# EAGLE board reva (EAGLE 9.6.2)
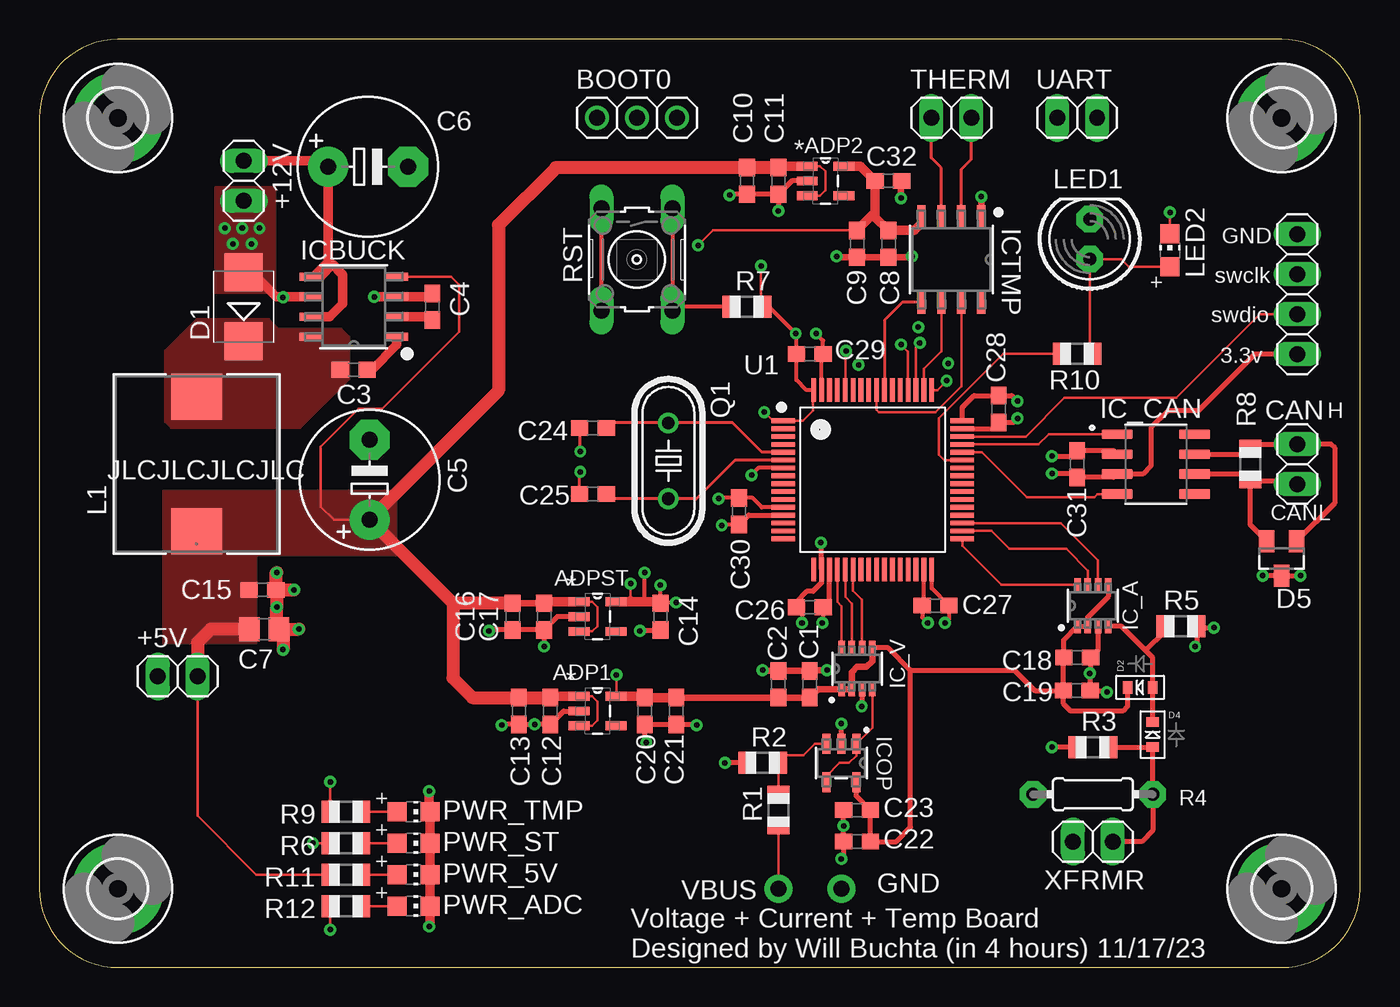
[diagram p0: board, top side]
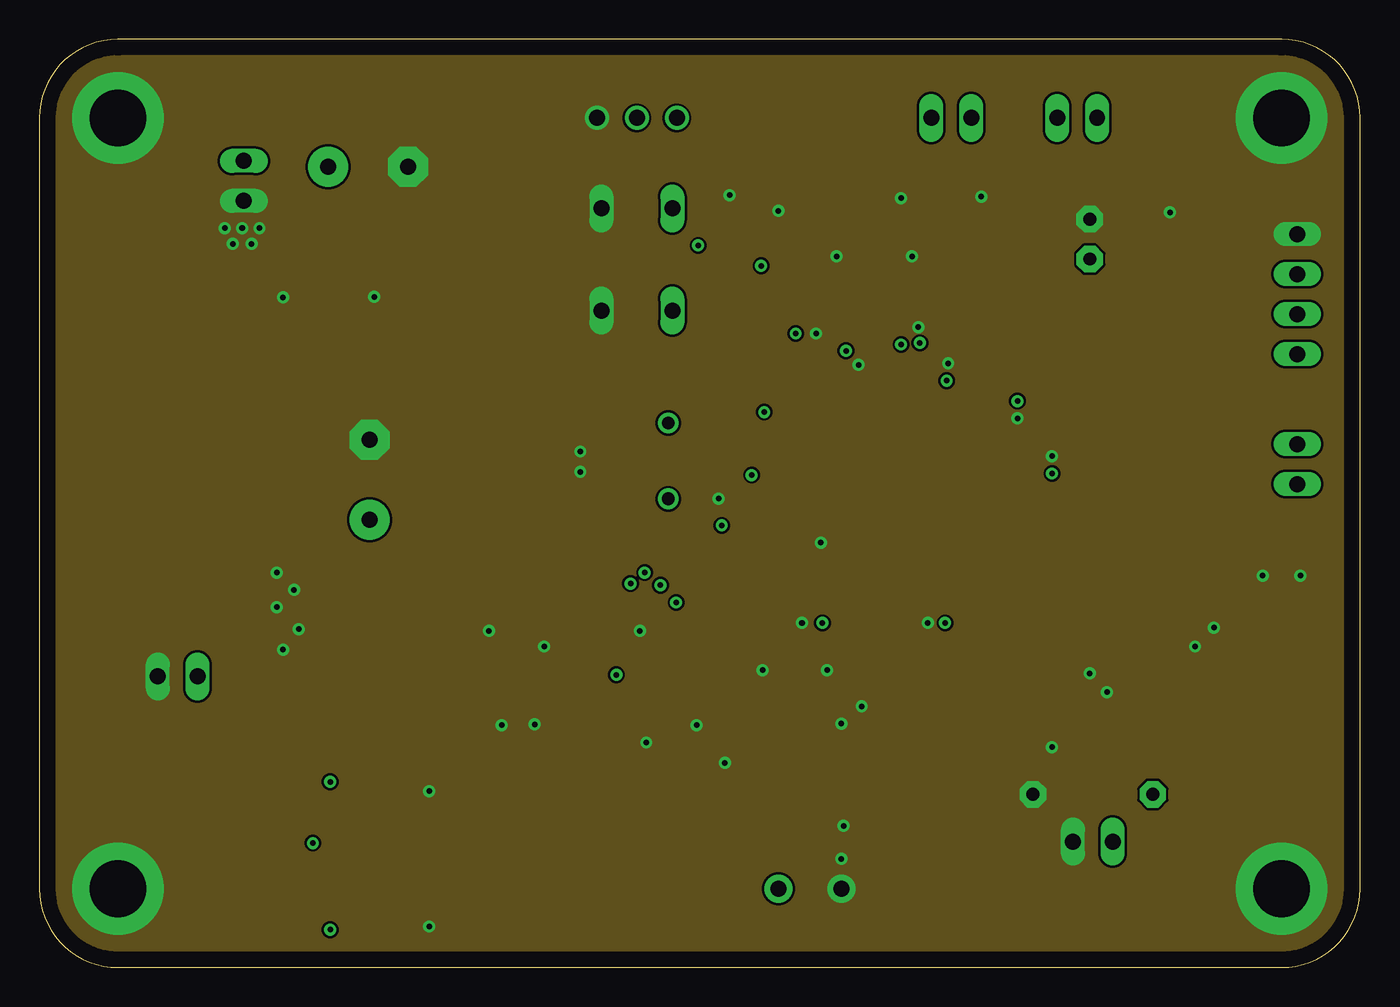
[diagram p1: board, inner layer Route2]
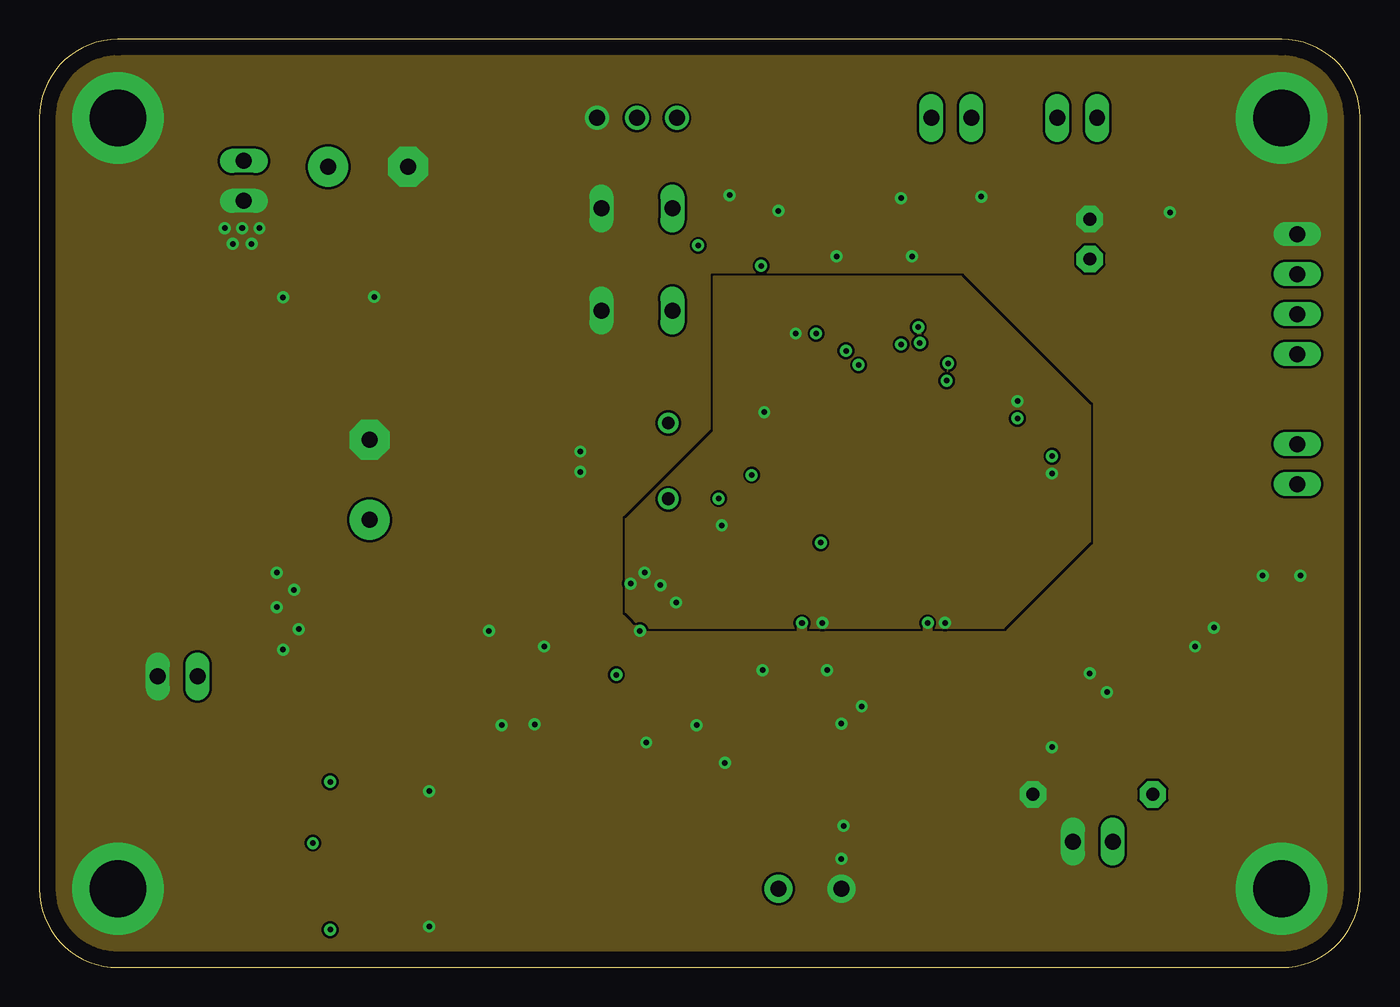
[diagram p2: board, inner layer Route15]
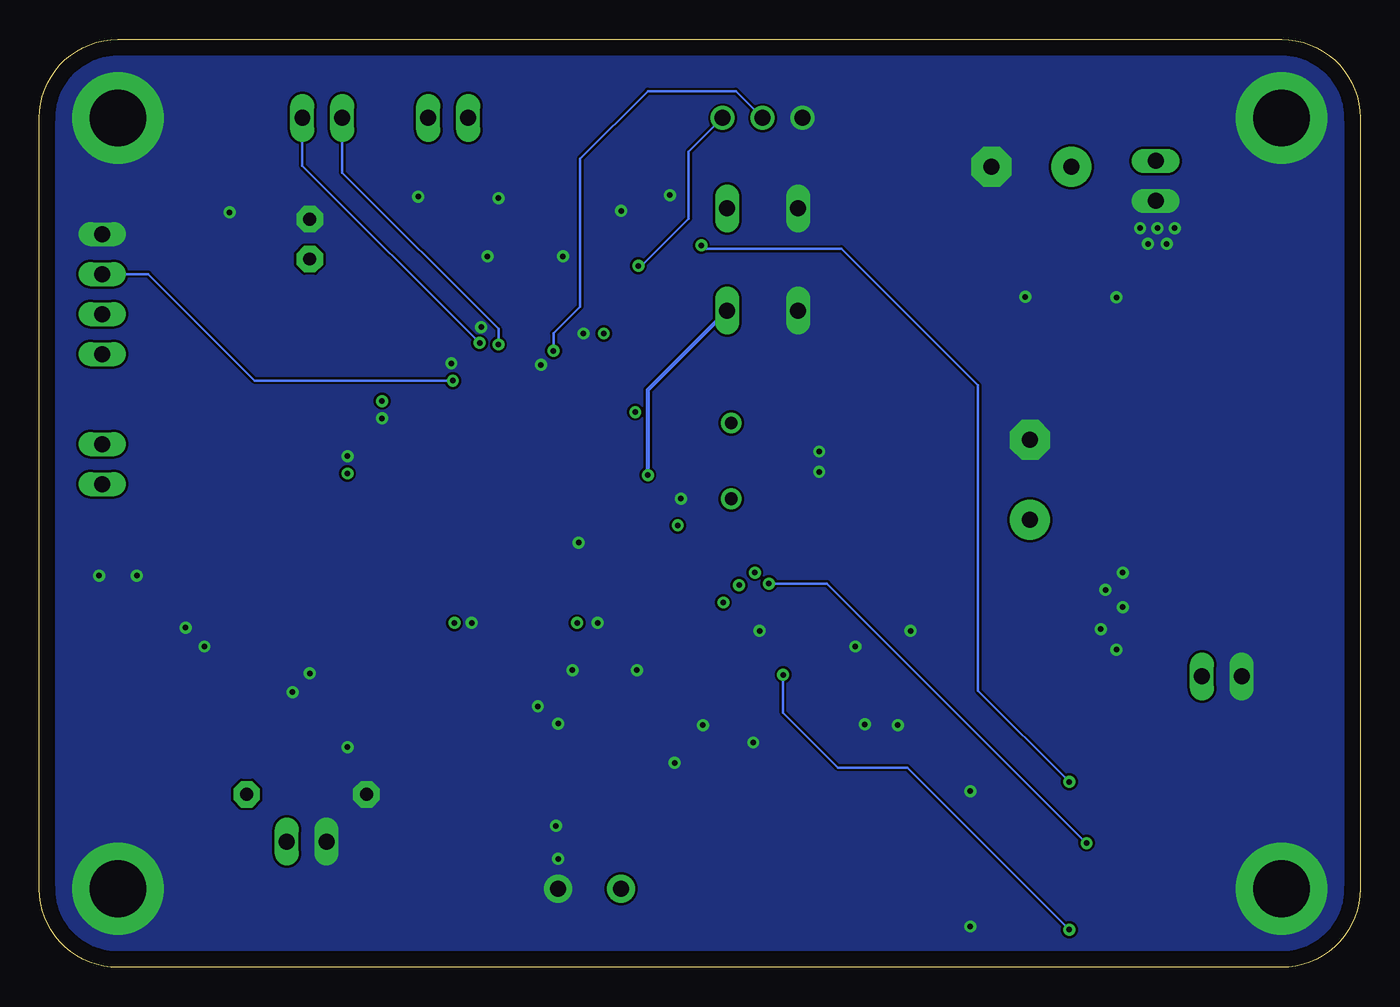
[diagram p3: board, bottom side, seen from below]

Size 84 x 59 mm. Coordinates in mm from the lower left corner, seen from the top.
Outline: 0,54 0,5 arc90 5,0 79,0 arc90 84,5 84,54 arc90 79,59 5,59 arc90 0,54
Copper layers (1+2*15+16): Top 0.035mm / dielectric 0.15mm / Route2 0.035mm / dielectric 0.15mm / Route15 0.035mm / dielectric 0.2mm / Bottom 0.035mm
Design rules "default *": minimum track width 6mil, minimum drill 0.3mm, track to track 6mil, track to pad 6mil, pad to pad 6mil, via to via 6mil, smd to smd 6mil, copper to edge 40mil, drill to drill 6mil, minimum pad ring 10mil, minimum via ring 8mil, stop-mask expansion 4mil, vias tented up to drill 0mil, thermal gap 10mil

## Footprints (pad centres in the part's own frame; a part is rotated, then mirrored left to right if it is on the bottom)
1X02 = drill 1.016 long: 1 -1.27,0; 2 1.27,0
SOT95P280X100-5N = smd 1.321 x 0.559: 1 -1.168,0.94; 2 -1.168,0; 3 -1.168,-0.94; 4 1.168,-0.94; 5 1.168,0.94
1X03 = drill 1.016: 1 -2.54,0; 2 0,0; 3 2.54,0
C0603 = smd 1.1 x 1: 1 -0.85,0; 2 0.85,0
E5-8,5 = drill 1.016 pad 2.54: + -2.54,0 | drill 1.016 pad 2.54 octagon: - 2.54,0
C0805 = smd 1.3 x 1.5: 1 -0.95,0; 2 0.95,0
SMB = smd 2.4 x 2.4: A 2.2,0; C -2.2,0
SOD-523 = smd 0.8 x 0.6: A 0,-0.8; K 0,0.8
SOT23 = smd 1 x 1.4: 1 -0.95,-1.1; 2 0.95,-1.1; 3 0,1.1
1X01-CLEANBIG = drill 1.016 pad 1.778: 1 0,0
3,6-PAD = drill 3.6 pad 5.842: B3,6 0,0
TSOT-23_TS8_LIT = smd 0.876 x 0.406: 1 -1.314,0.975; 2 -1.314,0.325; 3 -1.314,-0.325; 4 -1.314,-0.975; 5 1.314,-0.975; 6 1.314,-0.325; 7 1.314,0.325; 8 1.314,0.975
SOIC127P599X175-8N = smd 1.97 x 0.6: 1 -2.47,1.905; 2 -2.47,0.635; 3 -2.47,-0.635; 4 -2.47,-1.905; 5 2.47,-1.905; 6 2.47,-0.635; 7 2.47,0.635; 8 2.47,1.905
21-0041B_8_MXM = smd 1.46 x 0.533: 1 -2.724,1.905; 2 -2.724,0.635; 3 -2.724,-0.635; 4 -2.724,-1.905; 5 2.724,-1.905; 6 2.724,-0.635; 7 2.724,0.635; 8 2.724,1.905
RJ_5_ADI = smd 1.27 x 0.508: 1 -1.219,0.95; 2 -1.219,0; 3 -1.219,-0.95; 4 1.219,-0.95; 5 1.219,0.95
1X04 = drill 1.016 long: 1 -3.81,0; 2 -1.27,0; 3 1.27,0; 4 3.81,0
IND_IHLP-4040DZ_VIS = smd 2.921 x 3.251: 1 -4.28,0; 2 4.28,0
LED5MM = drill 0.813 pad 1.676 octagon: A -1.27,0; K 1.27,0
CHIP-LED0805 = smd 1.2 x 1.2: A 0,-1.05; C 0,1.05
HC49/S = drill 0.813: 1 -2.413,0; 2 2.413,0
R0805 = smd 1.1 x 1.4: 1 -1,0; 2 1,0
0204/7 = drill 0.813 pad 1.676 octagon: 1 -3.81,0; 2 3.81,0
B3F-10XX = drill 1.016 long: 1 -3.251,2.261; 2 3.251,2.261; 3 -3.251,-2.261; 4 3.251,-2.261
QFP50P1200X1200X160-64N = smd 1.5 x 0.3: 1 -5.7,3.75; 2 -5.7,3.25; 3 -5.7,2.75; 4 -5.7,2.25; 5 -5.7,1.75; 6 -5.7,1.25; 7 -5.7,0.75; 8 -5.7,0.25; 9 -5.7,-0.25; 10 -5.7,-0.75; 11 -5.7,-1.25; 12 -5.7,-1.75; 13 -5.7,-2.25; 14 -5.7,-2.75; 15 -5.7,-3.25; 16 -5.7,-3.75; 33 5.7,-3.75; 34 5.7,-3.25; 35 5.7,-2.75; 36 5.7,-2.25; 37 5.7,-1.75; 38 5.7,-1.25; 39 5.7,-0.75; 40 5.7,-0.25; 41 5.7,0.25; 42 5.7,0.75; 43 5.7,1.25; 44 5.7,1.75; 45 5.7,2.25; 46 5.7,2.75; 47 5.7,3.25; 48 5.7,3.75 | smd 0.3 x 1.5: 17 -3.75,-5.7; 18 -3.25,-5.7; 19 -2.75,-5.7; 20 -2.25,-5.7; 21 -1.75,-5.7; 22 -1.25,-5.7; 23 -0.75,-5.7; 24 -0.25,-5.7; 25 0.25,-5.7; 26 0.75,-5.7; 27 1.25,-5.7; 28 1.75,-5.7; 29 2.25,-5.7; 30 2.75,-5.7; 31 3.25,-5.7; 32 3.75,-5.7; 49 3.75,5.7; 50 3.25,5.7; 51 2.75,5.7; 52 2.25,5.7; 53 1.75,5.7; 54 1.25,5.7; 55 0.75,5.7; 56 0.25,5.7; 57 -0.25,5.7; 58 -0.75,5.7; 59 -1.25,5.7; 60 -1.75,5.7; 61 -2.25,5.7; 62 -2.75,5.7; 63 -3.25,5.7; 64 -3.75,5.7

## Placement (x,y rotation side)
+5V  [1X02]  8.8,18.5 0 top
+12V  [1X02]  13,50 90 top
ADP1  ADP122AUJZ-3.3-R7  [SOT95P280X100-5N]  35.5,16.3 0 top
ADP2  ADP122AUJZ-3.3-R7  [SOT95P280X100-5N]  50,50 0 top
ADPST  ADP122AUJZ-3.3-R7  [SOT95P280X100-5N]  35.5,22.3 0 top
BOOT0  [1X03]  38,54 0 top
C1  100n  [C0603]  49,18 90 top
C2  1u  [C0603]  47,18 90 top
C3  100n  [C0603]  20,38 180 top
C4  100n  [C0603]  25,42 90 top
C5  68u  [E5-8,5]  21,31 90 top
C6  68u  [E5-8,5]  20.9,50.9 0 top
C7  10u  [C0805]  14.3,21.5 0 top
C8  100n  [C0603]  54,46 270 top
C9  1u  [C0603]  52,46 270 top
C10  1u  [C0603]  45,50 270 top
C11  100n  [C0603]  47,50 270 top
C12  1u  [C0603]  32.5,16.3 270 top
C13  100n  [C0603]  30.5,16.3 270 top
C14  1u  [C0603]  39.5,22.3 270 top
C15  1u  [C0603]  14.2,24 0 top
C16  1u  [C0603]  30.1,22.3 270 top
C17  100n  [C0603]  32.1,22.3 270 top
C18  1u  [C0603]  66,19.7 0 top
C19  100n  [C0603]  65.98,17.6 0 top
C20  1u  [C0603]  38.5,16.3 270 top
C21  100n  [C0603]  40.5,16.3 270 top
C22  1u  [C0603]  52,8 180 top
C23  100n  [C0603]  52,10 180 top
C24  100n  [C0603]  35.2,34.3 180 top
C25  100n  [C0603]  35.2,30.1 180 top
C26  100n  [C0603]  49,22.9 180 top
C27  100n  [C0603]  57,23 180 top
C28  100n  [C0603]  61,35.5 270 top
C29  100n  [C0603]  49,39 0 top
C30  100n  [C0603]  44.5,29 90 top
C31  100n  [C0603]  66,32 90 top
C32  1u  [C0603]  54,50 0 top
CAN  [1X02]  80,32 90 top
D1  [SMB]  13,42 90 top
D2  [SOD-523]  70,17.8 90 top
D4  [SOD-523]  70.8,14.8 0 top
D5  PESD1CAN  [SOT23]  79,26 180 top
GND  [1X01-CLEANBIG]  51,5 0 top
H1  MOUNT-PAD-ROUND3.6  [3,6-PAD]  5,5 0 top
H2  MOUNT-PAD-ROUND3.6  [3,6-PAD]  79,54 0 top
H3  MOUNT-PAD-ROUND3.6  [3,6-PAD]  79,5 0 top
H4  MOUNT-PAD-ROUND3.6  [3,6-PAD]  5,54 0 top
IC_A  LTC2365  [TSOT-23_TS8_LIT]  67,23 90 top
IC_CAN  TCAN332DR  [SOIC127P599X175-8N]  71,32 0 top
IC_V  LTC2365  [TSOT-23_TS8_LIT]  52,19 90 top
ICBUCK  MAX5035BUSA+T  [21-0041B_8_MXM]  20,42 180 top
ICOP  AD8531  [RJ_5_ADI]  51,13 270 top
ICTMP  MAX31855KASA+T  [21-0041B_8_MXM]  58,45 270 top
JP1  [1X04]  80,42.8 90 top
L1  IHLP4040DZER101M11  [IND_IHLP-4040DZ_VIS]  10,32 90 top
LED1  [LED5MM]  66.8,46.3 90 top
LED2  [CHIP-LED0805]  71.9,45.6 0 top
PWR_5V  [CHIP-LED0805]  23.8,5.9 270 top
PWR_ADC  [CHIP-LED0805]  23.8,3.9 270 top
PWR_ST  [CHIP-LED0805]  23.8,7.9 270 top
PWR_TMP  [CHIP-LED0805]  23.8,9.9 270 top
Q1  [HC49/S]  40,32.2 270 top
R1  900k  [R0805]  47,10 90 top
R2  100k  [R0805]  46,13 0 top
R3  [R0805]  67,14 0 top
R4  [0204/7]  67,11 0 top
R5  10k  [R0805]  72.6,21.7 180 top
R6  1k  [R0805]  19.5,7.9 180 top
R7  10k  [R0805]  45,42 0 top
R8  120  [R0805]  77,32 90 top
R9  1k  [R0805]  19.5,9.9 180 top
R10  1k  [R0805]  66,39 180 top
R11  1k  [R0805]  19.5,5.9 180 top
R12  1k  [R0805]  19.5,3.9 180 top
RST  [B3F-10XX]  38,45 270 top
THERM  [1X02]  58,54 0 top
U1  STM32F105R8T6  [QFP50P1200X1200X160-64N]  53,31 0 top
UART  [1X02]  66,54 0 top
VBUS  [1X01-CLEANBIG]  47,5 0 top
XFRMR  [1X02]  67,8 0 top

## Library data of the parts
+5V +12V CAN JP1 THERM UART XFRMR = pinhead
ADP1 ADP2 ADPST = Analog Devices_By_element14_Batch_1; MPN: ADP122AUJZ-3.3-R7; OC_FARNELL: 1858064; OC_NEWARK: 60R3274; PACKAGE: SOT-23-5; SUPPLIER: ANALOG DEVICES
BOOT0 C5 C6 D2 D4 GND LED1 LED2 PWR_5V PWR_ADC PWR_ST PWR_TMP R1-R12 VBUS = adafruit
C1-C4 C7-C32 = rcl; SPICEPREFIX: C
D1 D5 = diode
H1-H4 = holes
IC_A IC_V = temp_sens_proj; COPYRIGHT: Copyright (C) 2023 Ultra Librarian. All rights reserved.; MANUFACTURER_PART_NUMBER: LTC2365ITS8#TRMPBF; MFR_NAME: Analog Devices Inc
IC_CAN = TCAN332DR; AVAILABILITY: In Stock; CHECK_PRICES: https://www.snapeda.com/parts/TCAN332DR/Texas+Instruments/view-part/?ref=eda; DESCRIPTION: 3.3-V CAN Transceivers; MF: Texas Instruments; MP: TCAN332DR; PACKAGE: SOIC-8 Texas Instruments; PRICE: None; PURCHASE-URL: https://www.snapeda.com/api/url_track_click_mouser/?unipart_id=381755&manufacturer=Texas Instruments&part_name=TCAN332DR&search_term=can; SNAPEDA_LINK: https://www.snapeda.com/parts/TCAN332DR/Texas+Instruments/view-part/?ref=snap
ICBUCK = max5035; COPYRIGHT: Copyright (C) 2023 Ultra Librarian. All rights reserved.; DIGIKEY_PART_NUMBER_1: MAX5035BUSA+T-ND; DIGIKEY_PART_NUMBER_2: MAX5035BUSA+TCT-ND; DIGIKEY_PART_NUMBER_3: MAX5035BUSA+TDKR-ND; DIGIKEY_PART_NUMBER_4: MAX5035BUSA+TTR-ND; MANUFACTURER_PART_NUMBER: max5035busa+T; MFR_NAME: Analog Devices Inc
ICOP = temp_sens_proj; COPYRIGHT: Copyright (C) 2023 Ultra Librarian. All rights reserved.; DIGIKEY_PART_NUMBER_1: AD8531ARTZ-REEL7CT-ND; DIGIKEY_PART_NUMBER_2: AD8531ARTZ-REEL7DKR-ND; DIGIKEY_PART_NUMBER_3: AD8531ARTZ-REEL7TR-ND; DIGIKEY_PART_NUMBER_4: 2156-AD8531ARTZ-REEL7-ND; MANUFACTURER_PART_NUMBER: AD8531ARTZ-REEL7; MFR_NAME: Analog Devices Inc
ICTMP = temp_sens_proj; COPYRIGHT: Copyright (C) 2023 Ultra Librarian. All rights reserved.; MANUFACTURER_PART_NUMBER: MAX31855KASA+T; MFR_NAME: Analog Devices / Maxim Integrated
L1 = temp_sens_proj; COPYRIGHT: Copyright (C) 2023 Ultra Librarian. All rights reserved.; DIGIKEY_PART_NUMBER_1: 541-1310-1-ND; DIGIKEY_PART_NUMBER_2: 541-1310-2-ND; DIGIKEY_PART_NUMBER_3: 541-1310-2-NDL; DIGIKEY_PART_NUMBER_4: 541-1310-6-ND; MANUFACTURER_PART_NUMBER: IHLP4040DZER101M11; MFR_NAME: Vishay
Q1 = adafruit; OC_FARNELL: 1667008; OC_NEWARK: unknown
RST = switch-omron; MPN: B3F-1000; OC_FARNELL: 176432; OC_NEWARK: 36M3542
U1 = STM32F105R8T6; CHECK_PRICES: https://www.snapeda.com/parts/STM32F105R8T6/STMicroelectronics/view-part/?ref=eda; DESCRIPTION: ARM® Cortex®-M3 STM32F1 Microcontroller IC 32-Bit 72MHz 64KB (64K x 8) FLASH 64-LQFP (10x10); DIGIKEY_PART_NUMBER: 497-8922-ND; MF: STMicroelectronics; MP: STM32F105R8T6; PACKAGE: LQFP-64 STMicroelectronics; PURCHASE-URL: https://www.snapeda.com/api/url_track_click_mouser/?unipart_id=423032&manufacturer=STMicroelectronics&part_name=STM32F105R8T6&search_term=None; SNAPEDA_LINK: https://www.snapeda.com/parts/STM32F105R8T6/STMicroelectronics/view-part/?ref=snap

## Nets
+5V: +5V.2 ADP1.1 ADP1.3 ADP2.1 ADP2.3 ADPST.1 ADPST.3 C5.+ C7.1 C10.1 C11.1 C12.1 C13.1 C15.1 C16.1 C17.1 ICBUCK.4 L1.1 R11.2
+12V: +12V.2 C6.+ ICBUCK.5 ICBUCK.7
AINV: IC_V.4 ICOP.1 ICOP.4
CAN_RX: IC_CAN.4 U1.44
CAN_TX: IC_CAN.1 U1.45
CANH: CAN.2 D5.1 IC_CAN.7 R8.2
CANL: CAN.1 D5.2 IC_CAN.6 R8.1
CUR+: D4.A R3.2 R4.2 XFRMR.2
GND: +5V.1 +12V.1 ADP1.2 ADP2.2 ADPST.2 BOOT0.1 C1.2 C2.2 C4.2 C5.- C6.- C7.2 C8.2 C9.2 C10.2 C11.2 C12.2 C13.2 C14.2 C15.2 C16.2 C17.2 C18.2 C19.2 C20.2 C21.2 C22.2 C23.2 C24.2 C25.2 C26.2 C27.2 C28.2 C29.2 C30.2 C31.2 C32.2 D1.A D5.3 GND.1 H1.B3,6 H2.B3,6 H3.B3,6 H4.B3,6 IC_A.3 IC_CAN.2 IC_V.3 ICBUCK.3 ICBUCK.6 ICOP.2 ICTMP.1 JP1.4 LED1.K LED2.C PWR_5V.C PWR_ADC.C PWR_ST.C PWR_TMP.C R2.1 R3.1 R4.1 R5.1 RST.3 RST.4 U1.12 U1.18 U1.31 U1.47 U1.63 XFRMR.1
HV: R1.1 VBUS.1
MAXPWR: ADP2.5 C8.1 C9.1 C32.1 ICTMP.4 R9.2
N$1: C3.2 D1.C ICBUCK.8 L1.2
N$2: C3.1 ICBUCK.1
N$3: PWR_ST.A R6.1
N$4: C4.1 ICBUCK.2
N$5: PWR_TMP.A R9.1
N$6: PWR_5V.A R11.1
N$7: PWR_ADC.A R12.1
N$15: R7.1 RST.1 RST.2 U1.7
N$16: R10.2 U1.43
N$17: LED1.A LED2.A R10.1
N$18: BOOT0.2 U1.60
N$24: C24.1 Q1.1 U1.5
N$25: C25.1 Q1.2 U1.6
RECTIFIED: D2.A D4.K IC_A.4 R5.2
SPI1_MISO: IC_V.6 U1.22
SPI1_NSS: IC_V.8 U1.20
SPI1_SCK: IC_V.7 U1.21
SPI2_MISO: IC_A.6 U1.35
SPI2_NSS: IC_A.8 U1.33
SPI2_SCK: IC_A.7 U1.34
SPI3_MISO: ICTMP.7 U1.56
SPI3_NSS: ICTMP.6 U1.50
SPI3_SCK: ICTMP.5 U1.55
SWCLK: JP1.3 U1.49
SWDIO: JP1.2 U1.46
T+: ICTMP.3 THERM.1
T-: ICTMP.2 THERM.2
UART_RX: U1.52 UART.1
UART_TX: U1.51 UART.2
VBUSIN: ICOP.3 R1.2 R2.2
VDD_OP: ADP1.5 C1.1 C2.1 C18.1 C19.1 C20.1 C21.1 C22.1 C23.1 D2.K IC_A.1 IC_A.2 IC_A.5 IC_V.1 IC_V.2 IC_V.5 ICOP.5 R12.2
VDD_STM32: ADPST.5 BOOT0.3 C14.1 C26.1 C27.1 C28.1 C29.1 C30.1 C31.1 IC_CAN.3 JP1.1 R6.2 R7.2 U1.1 U1.13 U1.19 U1.32 U1.48 U1.64

## Tracks (layer width: path | path; a pad name or v marks a point on that pad's centre or on a via)
+5V
  Top 0.152: ICBUCK.4 26.2,43.91 26.7,43.4 26.7,40.4 21.8,35.5 20.3,35.5 17.9,33.1 17.9,29.3 18.74,28.46 C5.+ | ADP1.3 35.16,15.36 35.5,15.7 35.5,16.9 35.16,17.24 ADP1.1 | ADPST.3 35.16,21.36 35.5,21.7 35.5,22.9 35.16,23.24 ADPST.1 | ADP2.3 49.66,49.06 50,49.4 50,50.6 49.66,50.94 ADP2.1 | R11.2 13.8,5.9 10.07,9.63 +5V.2
  Top 0.406: C16.1 C17.1
  Top 0.61: C12.1 32.59,17.24 ADP1.1 | C17.1 32.19,23.24 ADPST.1 | ADP2.1 47.09,50.94 C11.1
  Top 0.813: C7.1 10.9,21.5 10.07,20.67 +5V.2 | C12.1 C13.1 27.55,17.15 26.31,18.39 26.31,23.15 | C11.1 C10.1 32.85,50.85 29.2,47.2 29.2,36.66 C5.+ 26.31,23.15 | C16.1 26.31,23.15
  pour Top (no thermals): 7.9,30.3 22.7,30.3 22.7,26.2 13.8,26.2 13.8,20.6 7.9,20.6
+12V
  Top 0.406: ICBUCK.5 18.36,44.99
  Top 0.61: ICBUCK.5 17.88,43.91 18.66,44.69 19.3,44.05 19.3,42.2 18.46,41.37 ICBUCK.7 | 18.36,44.99 C6.+ 17.99,51.27 +12V.2
AINV
  Top 0.152: ICOP.4 50.05,12.15 50.9,13 51.5,13 51.95,13.45 ICOP.1 52.98,15.24 IC_V.4
CAN_RX
  Top 0.152: U1.44 59.95,32.75 62.8,29.9 67.1,29.9 67.3,30.09 IC_CAN.4
CAN_TX
  Top 0.152: IC_CAN.1 64.2,33.91 63.55,33.25 U1.45
CANH
  Top 0.305: D5.1 82.4,29.55 82.4,33 82.13,33.27 CAN.2 77.27,33.27 R8.2 76.64,32.63 IC_CAN.7
CANL
  Top 0.305: D5.2 77,28.15 77,30.9 | 77,30.9 R8.1 76.64,31.36 IC_CAN.6 | CAN.1 79.83,30.9 77,30.9
CUR+
  Top 0.305: XFRMR.2 70.1,8 70.81,8.71 R4.2 D4.A R3.2
GND  (via drill 0.35)
  Top 0.152: LED2.C v71.9,48
  Top 0.203: C24.2 34.35,32.85 v34.4,32.8 | C25.2 34.35,31.45 v34.4,31.5
  Top 0.254: U1.63 49.75,38.9 C29.2 49.85,39.85 v49.4,40.3 | RST.4 RST.3 | U1.12 45.95,29.25 45.35,29.85 C30.2 43.25,29.85 v43.2,29.8 | U1.31 56.25,23.1 C27.2 56.15,22.25 v56.5,21.9 | C26.2 48.5,22.55 v48.5,21.9
  Top 0.305: ADP1.2 33.35,16.3 C12.2 v31.5,15.45 C13.2 29.45,15.45 v29.4,15.4 | v38.6,14.3 38.5,14.4 C20.2 C21.2 41.75,15.45 v41.8,15.4 | R2.1 v43.6,13 | C23.2 v51.15,9 C22.2 51.15,7.05 v51,6.9 | ICOP.2 v51,15.5 | IC_V.3 52.33,16.62 v52.3,16.6 | C14.2 39.45,21.4 v38.2,21.4 | ADPST.2 32.95,22.3 C17.2 | C17.2 C16.2 28.65,21.45 v28.6,21.4 | C17.2 v32.1,20.4 | v49.7,27 49.75,26.95 U1.18 49.75,24.45 49.2,23.9 48.8,23.9 48.15,23.25 C26.2 | IC_A.3 67.33,20.18 C18.2 66.85,18.75 v66.8,18.7 66.83,18.67 C19.2 67.8,17.6 v67.9,17.5 | R3.1 v64.4,14 | v73.5,20.4 73.6,20.5 R5.1 73.7,21.6 v74.7,21.6 | v77.8,24.9 D5.3 v80.2,24.9 | IC_CAN.2 68.31,32.85 C31.2 65.65,32.5 v64.4,32.5 | U1.47 60.6,34.25 C28.2 61.95,34.65 v62.2,34.9 | ADP2.2 47.85,50 C11.2 | C11.2 C10.2 43.95,49.15 v43.9,49.1 | C11.2 v47,48.1
  Top 0.406: v46,18.9 46.05,18.85 C2.2 C1.2 49.05,18.9 v50.1,18.9 | v50.7,45.2 50.75,45.15 C9.2 C8.2 55.45,45.15 v55.5,45.2 | C32.2 54.8,49.95 v54.8,48.9 | ICTMP.1 v59.91,48.99 v59.9,49
  Top 0.61: ICBUCK.6 16,42.63 15.54,42.63 | 15.54,42.63 15.06,42.63 13.5,44.2 D1.A | C4.2 24.79,42.63 ICBUCK.3 v21.3,42.63 | v24.8,11.2 24.8,9.95 PWR_TMP.C PWR_ST.C PWR_5V.C PWR_ADC.C 24.85,2.65 v24.8,2.6 | v15.5,42.6 15.54,42.63
  Top 0.813: C15.2 15.05,25.05 v15.1,25.1 | C15.2 v16.2,24 | C15.2 15.1,23.95 v15.1,22.9 15.1,21.65 C7.2 | C7.2 v16.5,21.5 | C7.2 15.5,21.25 v15.5,20.2
  other vias: 11.8,47 12.9,47 14,47 12.3,46 13.5,46 57.8,38.4 55.9,40.7 52.1,38.3
  pour Route2 (no thermals): -1.8,60 85,60 85,-2 -1.8,-2
  pour Bottom (no thermals): -2,60 84,60 84,-2 -2,-2
  pour Top (no thermals): 11.2,49.6 15,49.6 15,42.9 11.2,42.9
  pour Route15 (rank 2, no thermals): -0.7,60 85.3,60 85.3,-2 -0.7,-2
HV
  Top 0.152: R1.1 VBUS.1
MAXPWR  (via drill 0.35)
  Top 0.152: v41.9,45.9 42.85,46.85 C9.1 | 18.5,10.5 v18.5,11.8
  Top 0.406: R9.2 18.5,10.5
  Top 0.61: ADP2.5 52.21,50.94 C32.1 53.15,48 | 53.15,48 53.15,47.7 C8.1 55.65,46.85 56.09,47.3 ICTMP.4 | C9.1 53.15,48
  Bottom 0.152: v41.9,45.9 41.7,45.7 33,45.7 24.3,37 24.3,17.6 v18.5,11.8
N$1
  pour Top (no thermals): 19.7,38.5 19.7,40.1 19.2,40.6 15.2,40.6 14.6,41.2 10,41.2 9,40.2 8,39.2 8,34.7 8.4,34.3 11.7,34.3 16.6,34.3 19.7,37.4
N$2
  Top 0.61: C3.1 21.15,38 22.72,39.57 ICBUCK.1
N$3
  Top 0.152: R6.1 PWR_ST.A
N$4
  Top 0.61: C4.1 24.79,41.37 ICBUCK.2
N$5
  Top 0.152: R9.1 PWR_TMP.A
N$6
  Top 0.152: R11.1 PWR_5V.A
N$7
  Top 0.152: R12.1 PWR_ADC.A
N$15  (via drill 0.35)
  Top 0.254: R7.1 40.51,42 40.31,41.79 | 40.31,41.79 RST.2 | RST.1 40.26,41.84 40.31,41.79 | U1.7 45.75,31.75 v45.3,31.3
  Bottom 0.254: v45.3,31.3 45.3,36.71 RST.2
N$16
  Top 0.152: U1.43 57.55,32.25 57.2,32.6 57.2,34.9 61.3,39 R10.2
N$17
  Top 0.152: R10.1 66.8,39.2 LED1.A 68.8,45.03 69.28,44.55 LED2.A
N$18  (via drill 0.35)
  Top 0.152: v51.3,39.2 51.25,39.15 U1.60
  Bottom 0.152: BOOT0.2 39.7,55.7 45.3,55.7 49.6,51.4 49.6,42 51.3,40.3 v51.3,39.2
N$24
  Top 0.203: U1.5 45.95,32.75 44.09,34.61 Q1.1 36.36,34.61 C24.1
N$25
  Top 0.152: 36.27,29.88 C25.1
  Top 0.203: U1.6 44.25,32.25 41.79,29.79 Q1.2 36.36,29.79 36.27,29.88
RECTIFIED
  Top 0.305: D4.K D2.A 70.8,19.7 70.35,20.15 | IC_A.4 68.81,21.69 70.35,20.15 | 70.35,20.15 71.6,21.4 R5.2
SPI1_MISO
  Top 0.152: IC_V.6 52.33,23.38 51.75,23.95 U1.22
SPI1_NSS
  Top 0.152: IC_V.8 51.02,22.98 50.75,23.25 U1.20
SPI1_SCK
  Top 0.152: IC_V.7 51.67,23.12 51.25,23.55 U1.21
SPI2_MISO
  Top 0.152: U1.35 64.95,28.25 67.33,25.88 IC_A.6
SPI2_NSS
  Top 0.152: IC_A.8 61.19,24.31 58.7,26.8 U1.33
SPI2_SCK
  Top 0.152: IC_A.7 66.67,25.23 65.3,26.6 61.7,26.6 60.55,27.75 U1.34
SPI3_MISO
  Top 0.152: ICTMP.7 58.63,36.94 57,35.3 53.4,35.3 53.25,35.45 U1.56
SPI3_NSS
  Top 0.152: ICTMP.6 57.37,39.16 56.25,38.05 U1.50
SPI3_SCK
  Top 0.203: ICTMP.5 54.88,42.28 53.75,41.15 U1.55
SWCLK  (via drill 0.35)
  Top 0.152: U1.49 57.1,36.7 v57.7,37.3
  Bottom 0.152: v57.7,37.3 70.3,37.3 77.07,44.07 JP1.3
SWDIO
  Top 0.152: U1.46 62.75,33.75 65.2,36.2 72.3,36.2 77.63,41.53 JP1.2
T+
  Top 0.203: ICTMP.3 57.37,50.84 56.73,51.47 THERM.1
T-
  Top 0.203: ICTMP.2 58.63,50.73 59.27,51.37 THERM.2
UART_RX  (via drill 0.35)
  Top 0.152: U1.52 55.25,39.15 v54.8,39.6
  Bottom 0.152: UART.1 64.73,50.53 54.8,40.6 v54.8,39.6
UART_TX  (via drill 0.35)
  Top 0.152: v56,39.7 55.75,39.45 U1.51
  Bottom 0.152: UART.2 67.27,50.97 v56,39.7
VBUSIN
  Top 0.152: R1.2 R2.2 47.5,13.5 48.6,13.5 49.32,14.22 ICOP.3
VDD_OP  (via drill 0.35)
  Top 0.152: R12.2 v18.5,2.4 | v36.7,18.6 36.7,17.27 ADP1.5
  Top 0.305: ICOP.5 51.95,10.9 C23.1 C22.1 54.5,8 55.4,8.9 55.4,18.9 | IC_V.5 53.99,20.31 55.4,18.9 | 55.4,18.9 62,18.9 63.3,17.6 C19.1 | C19.1 65.13,19.68 C18.1 65.15,20.81 IC_A.1 IC_A.2 66.67,22.27 67.97,23.57 IC_A.5 | D2.K 69.2,16.6 68.9,16.3 65.6,16.3 65.13,16.77 C19.1
  Top 0.406: C21.1 C2.1 C1.1 49.54,17.69 IC_V.1 IC_V.2 51.67,18.77 52,19.1 52.6,19.1 52.98,19.48 IC_V.5
  Top 0.61: ADP1.5 38.41,17.24 C20.1 C21.1
  Bottom 0.152: v18.5,2.4 28.8,12.7 33.2,12.7 36.7,16.2 v36.7,18.6
VDD_STM32  (via drill 0.35)
  Top 0.152: R6.2 v17.4,7.9 | v37.6,24.4 37.6,23.3 | v45.9,44.6 45.9,42.1 R7.2 | 49.2,36.7 49.2,35.4 48.55,34.75 U1.1 46.65,34.75 v46.1,35.3
  Top 0.254: C30.1 43.45,28.15 v43.4,28.1 | C26.1 49.85,21.95 v49.8,21.9 | v39.5,24.3 C14.1 39.55,23.2 v40.5,23.2 | 38.4,23.24 38.5,23.34 v38.5,25.1 | U1.64 49.2,36.7 48.8,36.7 48.15,37.35 C29.1 48.15,40.25 v48.1,40.3 46.4,42 R7.2 | U1.32 56.75,24.1 C27.1 57.85,22.15 v57.6,21.9
  Top 0.305: C30.1 45.1,28.75 U1.13 | C26.1 50.25,23.3 U1.19 | U1.48 58.7,35.6 59.45,36.35 C28.1 61.85,36.35 v62.2,36 | v64.4,31.4 65.75,31.4 C31.1 68.31,31.15 IC_CAN.3 70.17,31.36 70.7,31.9 70.7,34.3 71.8,35.4 73.7,35.4 77.29,38.99 JP1.1
  Top 0.61: C14.1 39.41,23.24 38.4,23.24 ADPST.5 37.54,23.24 37.6,23.3
  Bottom 0.152: v17.4,7.9 33.9,24.4 v37.6,24.4 | BOOT0.3 42.7,51.84 42.7,47.6 45.7,44.6 v45.9,44.6
  pour Route15: 37.3,22.6 38.3,21.6 61.3,21.6 66.8,27.1 66.8,35.7 58.6,43.9 42.9,43.9 42.9,34.1 37.3,28.5

## Text on the board
tPlace: GND | swclk | swdio | 3.3v | H | JLCJLCJLCJLC | CANL | Voltage + Current + Temp Board / Designed by Will Buchta (in 4 hours) 11/17/23